# EAGLE board PixiFlood.hat (EAGLE 9.3.2)
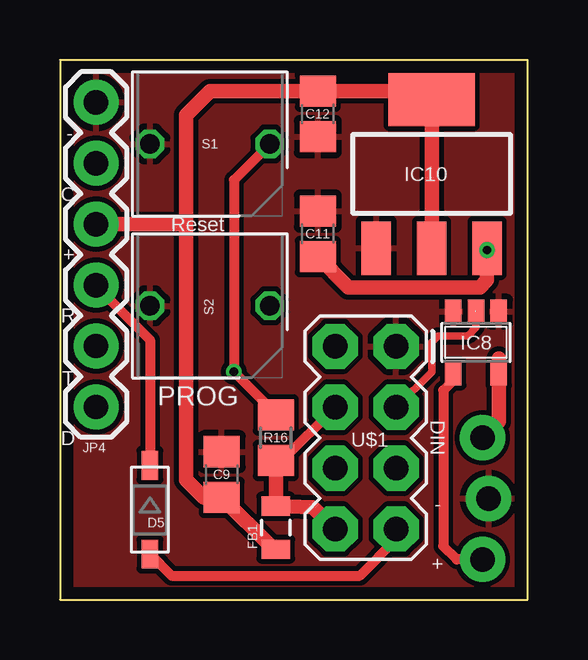
[diagram p0: board, top side]
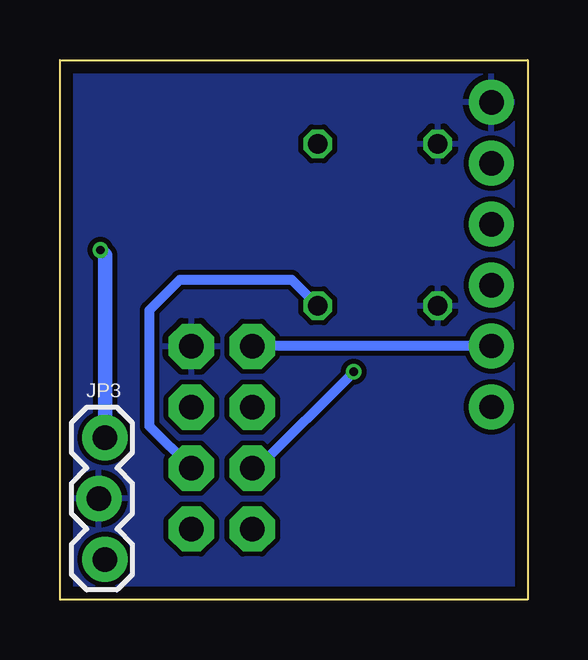
[diagram p1: board, bottom side, seen from below]

Size 19.5 x 22.5 mm. Coordinates in mm from the lower left corner, seen from the top.
Outline: 0,0 19.5,0 19.5,22.5 0,22.5 0,0
Copper layers (1*16): Top 0.035mm / dielectric 1.6mm / Bottom 0.035mm
Design rules "Elecrow_2-layer_PCB_eagle_rule": minimum track width 6mil, minimum drill 12mil, track to track 6mil, track to pad 6mil, pad to pad 6mil, via to via 8mil, smd to smd 0mil, copper to edge 20mil, drill to drill 10mil, minimum pad ring 6mil, minimum via ring 6mil, stop-mask expansion 0mil, vias tented up to drill 100mil, thermal gap 10mil
Net classes: 0 default: width 0.203 mm, clearance 0.205 mm; 1 vcc: width 0.305 mm; 2 +V: width 0.813 mm; 3 +5V: width 0.406 mm

## Footprints (pad centres in the part's own frame; a part is rotated, then mirrored left to right if it is on the bottom)
C0805 = smd 1.3 x 1.5: 1 -0.95,0; 2 0.95,0
SOD-123 = smd 1.2 x 0.7: A 1.85,0; C -1.85,0
0805 = smd 0.8 x 1.2: 1 -0.9,0; 2 0.9,0
SOT23-5 = smd 0.69 x 0.99: 1 -0.95,-1.29; 2 0,-1.29; 3 0.95,-1.29; 4 0.95,1.3; 5 -0.95,1.3
SOT-223-3 = smd 1.219 x 2.235: 1 -2.311,-3.099; 2 0,-3.099; 3 2.311,-3.099 | smd 3.6 x 2.2: 4 0,3.099
1X03_LOCK = drill 1.016 pad 1.88: 1 0,0.127; 2 2.54,-0.127; 3 5.08,0.127
1X06 = drill 1.016 pad 1.88: 1 0,0; 2 2.54,0; 3 5.08,0; 4 7.62,0; 5 10.16,0; 6 12.7,0
R0805 = smd 1.3 x 1.5: 1 -0.95,0; 2 0.95,0
TACT_5MM = drill 0.8 octagon: 1 0,0; 2 5,0
2X4-ESP = drill 1.016 pad 1.88 octagon: 1 -3.81,1.27; 2 -1.27,1.27; 3 1.27,1.27; 4 3.81,1.27; 5 -3.81,-1.27; 6 -1.27,-1.27; 7 1.27,-1.27; 8 3.81,-1.27

## Placement (x,y rotation side)
C9  [C0805]  6.75,5.21 90 top
C11  [C0805]  10.75,15.25 90 top
C12  [C0805]  10.75,20.25 270 top
D5  1N4148  [SOD-123]  3.75,3.75 270 top
FB1  FB  [0805]  9,3 90 top
IC8  74LVC1G125DBV  [SOT23-5]  17.35,10.72 180 top
IC10  LM1117-2-SOT223  [SOT-223-3]  15.5,17.75 0 top
JP3  [1X03_LOCK]  17.75,6.75 270 bottom
JP4  [1X06]  1.51,20.73 270 top
R16  10k  [R0805]  9,6.75 270 top
S1  [TACT_5MM]  8.75,19 180 top
S2  [TACT_5MM]  8.75,12.25 180 top
U$1  M04X2ESP  [2X4-ESP]  12.75,6.75 270 top

## Library data of the parts
C9 C11 C12 = rcl; SPICEPREFIX: C
D5 = diode
FB1 = SparkFun-Passives
IC8 = logic
IC10 = regulators
JP3 = connectors
JP4 U$1 = headers
R16 = rcl; SPICEPREFIX: R
S1 S2 = switch

## Nets
+3V3: C9.1 C12.1 FB1.1 IC10.2 IC10.4 JP4.3
+5V: C11.1 IC8.5 IC10.3 JP3.1
CTS: JP4.2
DIN-IN: IC8.4 JP3.3
DTR: JP4.6
GND: C9.2 C11.2 C12.2 IC8.1 IC8.3 IC10.1 JP3.2 JP4.1 S1.2 S2.2 U$1.1
GPIO0: S2.1 U$1.3
GPIO2: IC8.2 U$1.2
N$8: D5.C JP4.4
RST: R16.1 S1.1 U$1.7
RXD: D5.A U$1.4
TXD: JP4.5 U$1.5
VCC: FB1.2 R16.2 U$1.6 U$1.8

## Tracks (layer width: path | path; a pad name or v marks a point on that pad's centre or on a via)
+3V3
  Top 0.61: IC10.2 IC10.4 15.15,21.2 C12.1 6.25,21.2 5.25,20.2 5.25,15.65 | FB1.1 8.86,2.15 C9.1 5.99,4.26 5.25,5 5.25,15.65 | JP4.3 5.25,15.65
+5V  (via drill 0.35)
  Top 0.406: C11.1 10.65,14.4
  Top 0.61: 18.3,10.05 IC8.5 18.3,7.43 JP3.1 | IC10.3 | IC10.3 v17.81,14.57 17.81,13.33 17.5,13.02 12.03,13.02 C11.1
  Bottom 0.61: JP3.1 17.62,14.37 v17.81,14.56 v17.81,14.57
DIN-IN
  Top 0.406: IC8.4 16.4,9.14 15.98,8.72 15.98,2.23 16.54,1.67 JP3.3
GND
  pour Bottom: 0,22.5 19.5,22.5 19.5,0 0,0
  pour Top: 0,0 19.5,0 19.5,22.5 0,22.5
GPIO0
  Bottom 0.406: S2.1 9.84,13.34 14.5,13.34 15.77,12.06 15.77,7.23 U$1.3
GPIO2
  Top 0.305: IC8.2 17.35,11.35 17,11 15.75,11 15.5,10.75 15.5,9.5 U$1.2
N$8
  Top 0.406: D5.C 3.75,10.82 1.51,13.07 JP4.4
RST  (via drill 0.35)
  Top 0.406: S1.1 7.25,17.5 v7.25,9.5 9,7.75 R16.1
  Bottom 0.406: v7.25,9.5 11.27,5.48 U$1.7
RXD
  Top 0.406: U$1.4 14.02,2.52 12.5,1 4.65,1 D5.A
TXD
  Bottom 0.406: JP4.5 11.47,10.57 U$1.5
VCC
  Top 0.406: R16.2 9.26,5.8 U$1.6
  Top 0.61: R16.2 FB1.2 10.55,3.85 11.4,3 11.48,3 U$1.8

## Text on the board
tPlace: - | C | Reset | + | R | T | PROG | D | DIN | - | +
Measures: Measurements in mm
_tNames: C2 | R9 | R8 | C4 | R7 | D1 | L1 | IC2 | C3 | C5 | D2 | R3 | L2 | IC4 | R10 | R6 | R5 | R4 | C6 | IC1 | D3 | R2 | IC3 | L3 | IC5 | R11 | R1 | IC7 | D4 | C7 | L4 | IC6 | R12 | C1